# Altium PCB GaN_Driver.PcbDoc
Units mil, origin at the board's own origin, x right, y up, seen from the top; angles counter-clockwise.
Board outline 921.26 x 1011.81 mil, 4 copper layers (Top Layer, GND, Power, Bottom Layer), stack 30.634 mil thick; 29 components, 18 nets, 76 pads, 76 vias.
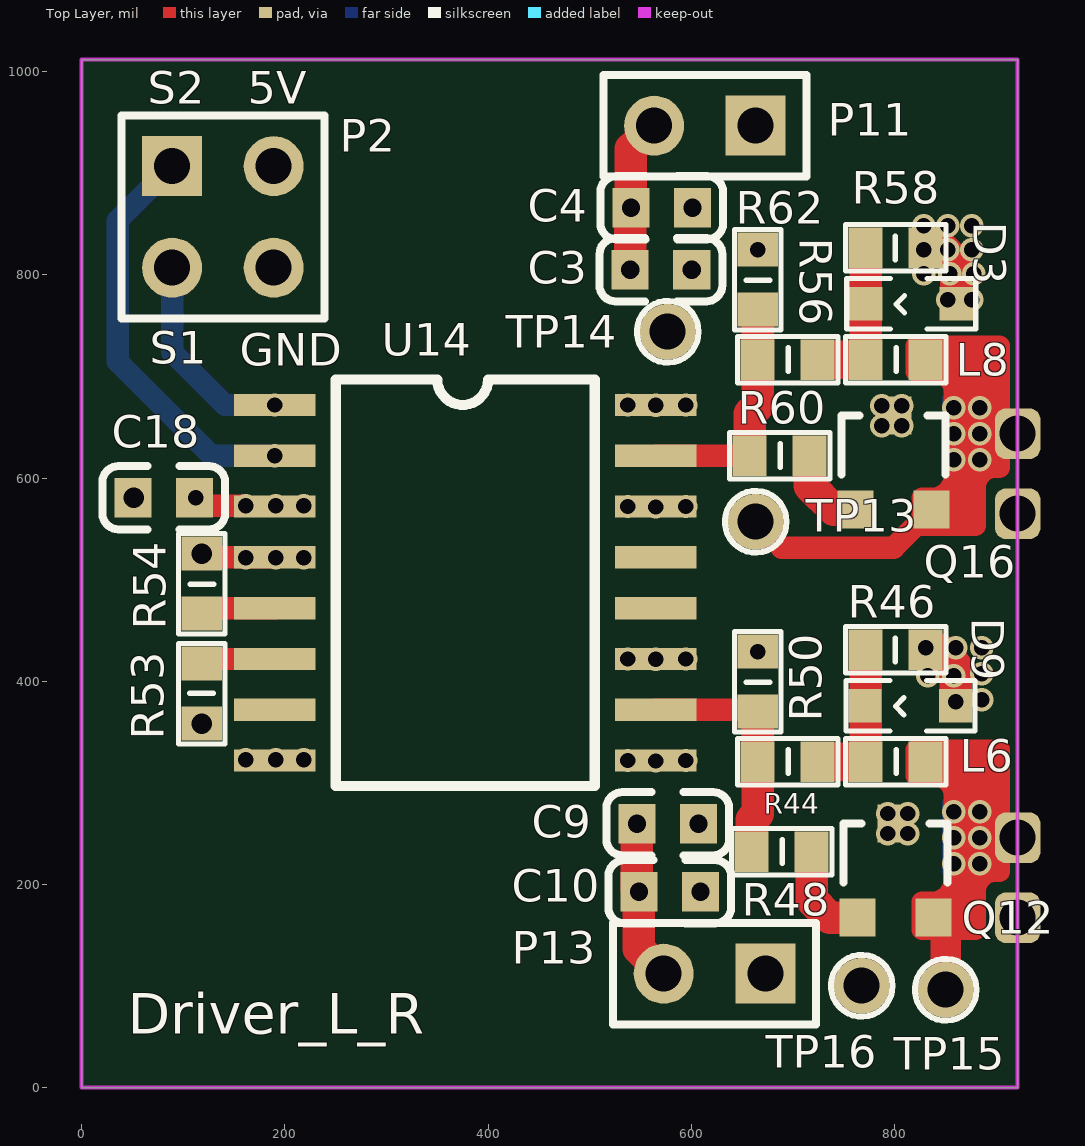
[diagram p0: Top Layer view]
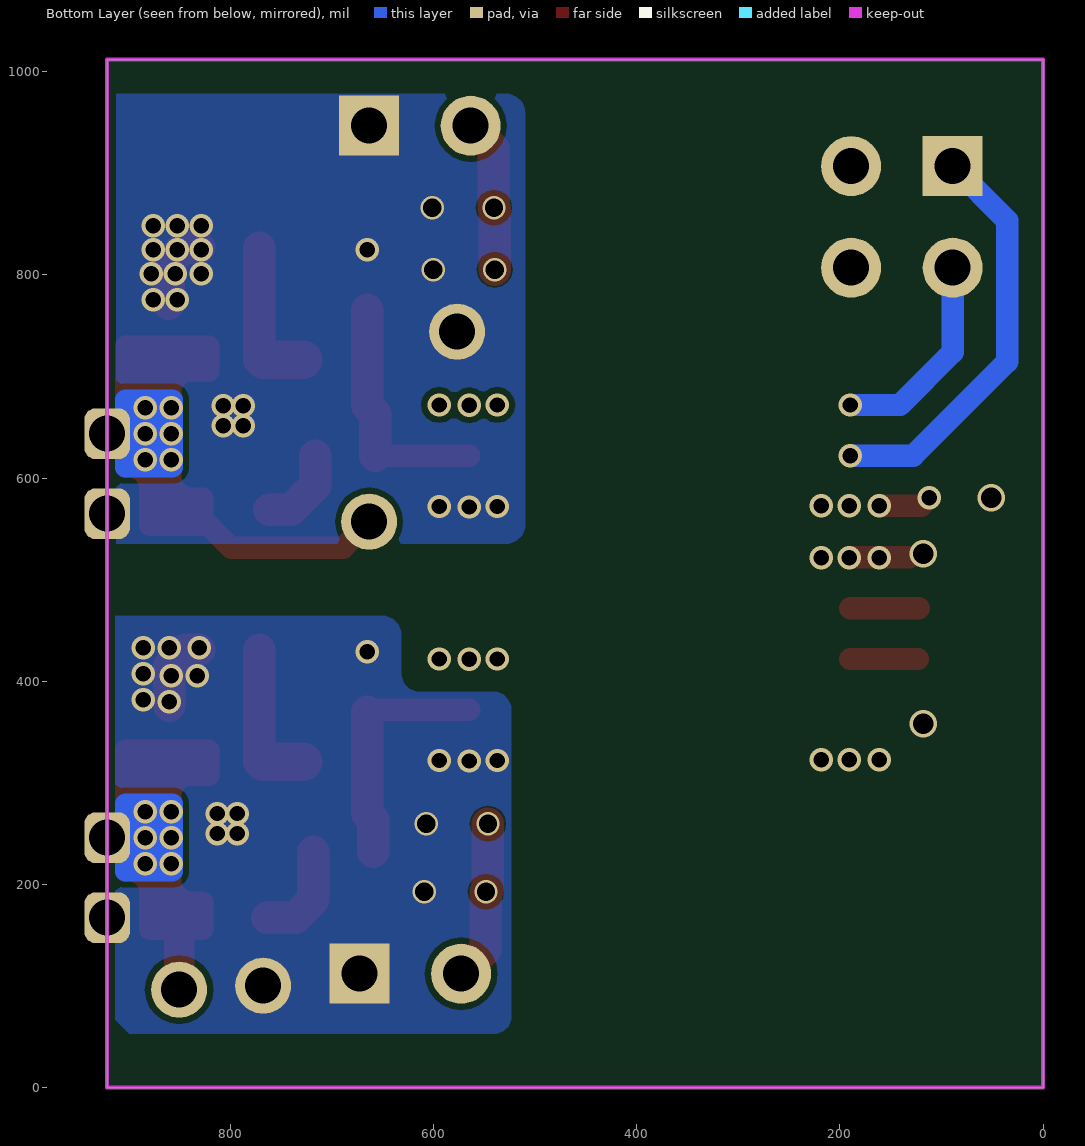
[diagram p1: Bottom Layer view, seen from below]
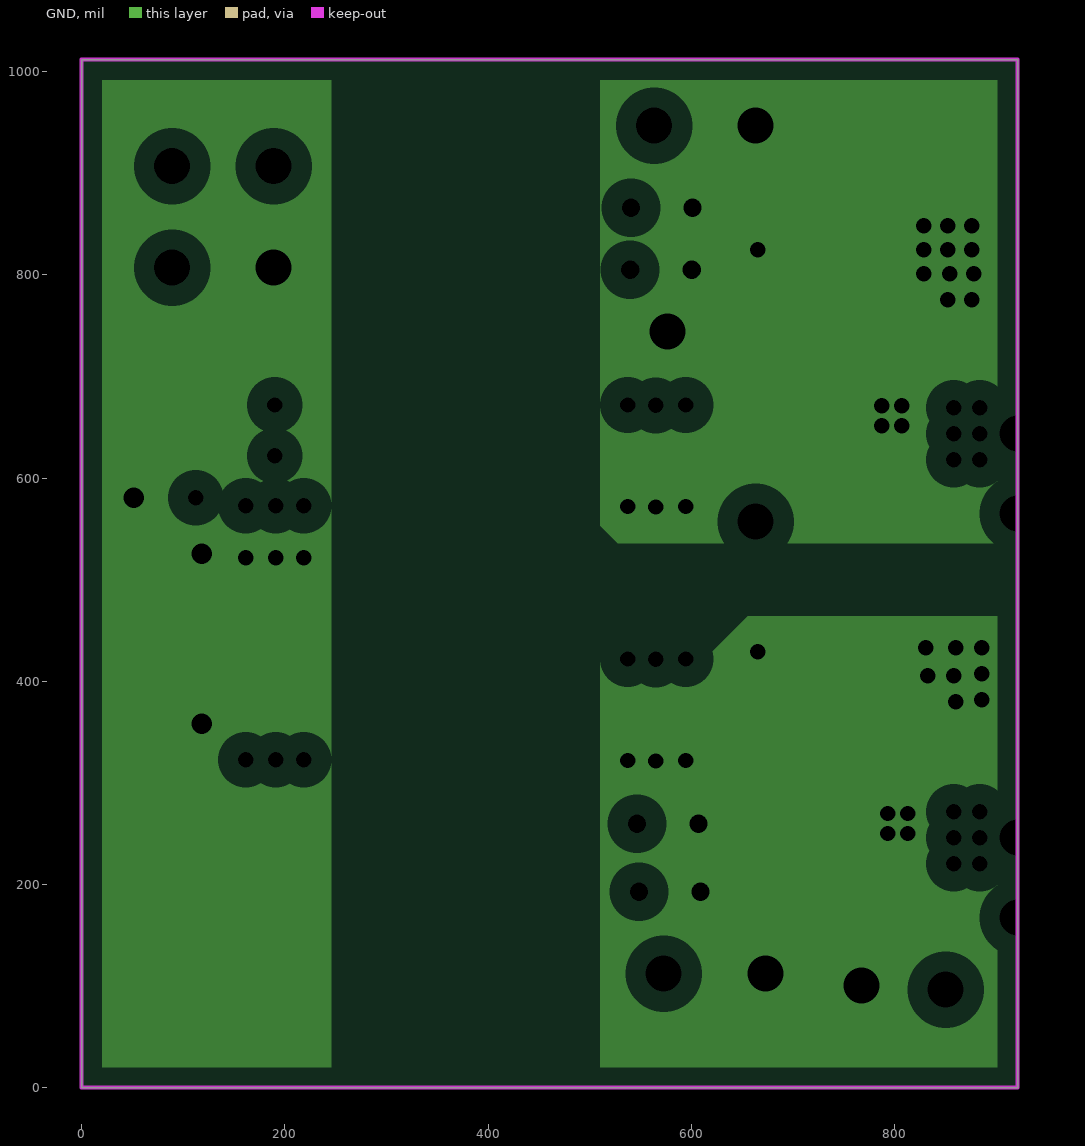
[diagram p2: GND, clearances drawn from the general rule]
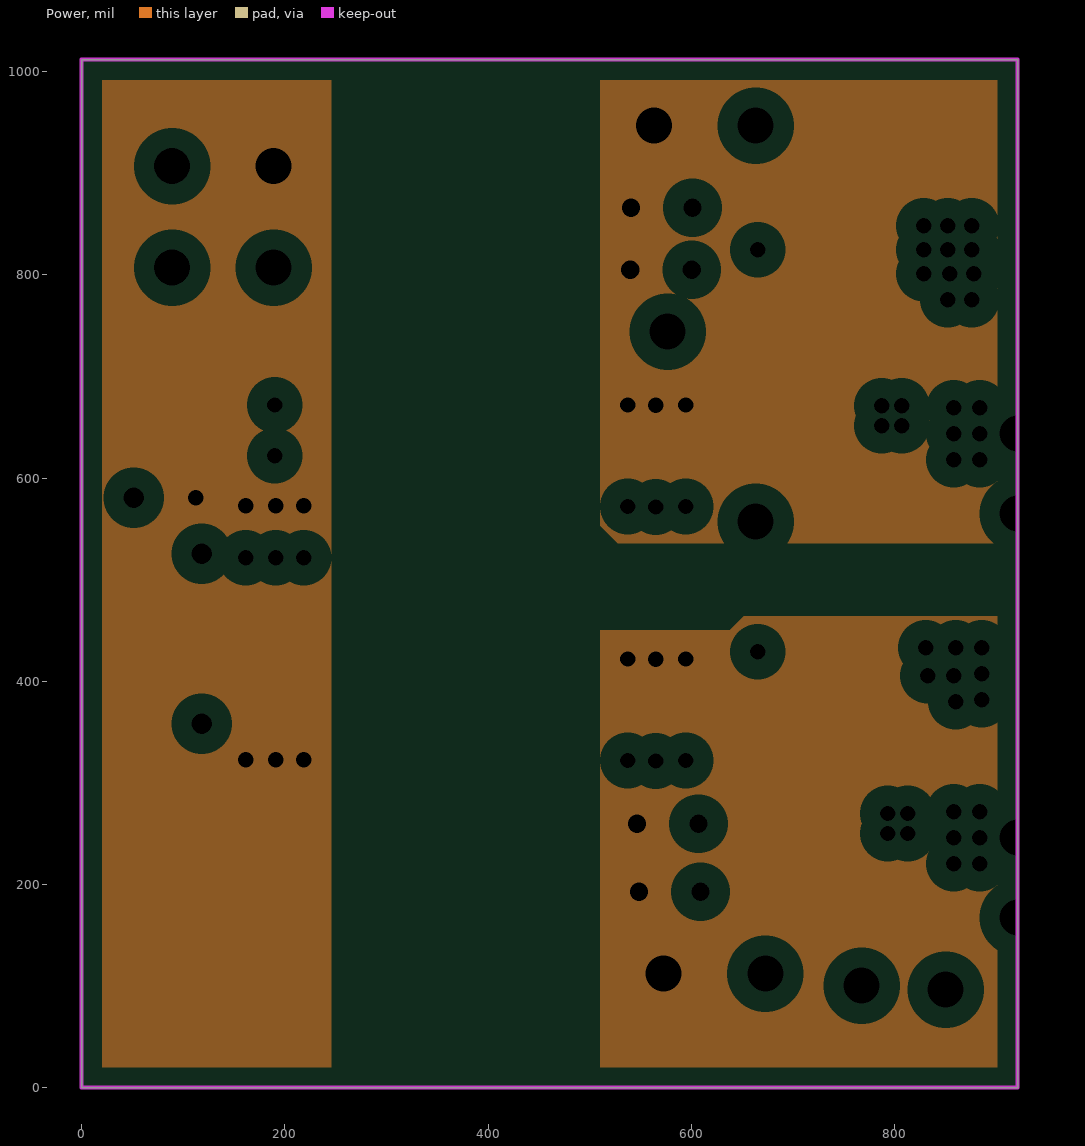
[diagram p3: Power, clearances drawn from the general rule]

## Layer stack, top to bottom
Top Solder: solder mask 0.4, Solder Resist, Dk 3.5
Top Layer: signal copper 1.4
Dielectric 1: core 10, FR-4, Dk 4.2
GND: plane copper 1.417
Dielectric 3: prepreg 5, Dk 4.2
Power: plane copper 1.417
Dielectric 2: core 10, Dk 4.2
Bottom Layer: signal copper 1.4
Bottom Solder: solder mask 0.4, Solder Resist, Dk 3.5

## Board outline
0,0 0,1011.81 921.26,1011.81 921.26,0

## Design rules (kind name [scope] priority, off if disabled: settings)
Clearance [All] p1: gap=5.91
ComponentClearance [All] p1: gap=1 collisioncheckmode=3 verticalgap=10 showdistances=FALSE
PlaneClearance [All] p1: clearance=20
PlaneConnect [All] p1: planeconnectstyle=Direct reliefexpansion=20 reliefentries=4 reliefconductorwidth=10 reliefairgap=10
PolygonConnect [All] p1: connectstyle=Direct reliefconductorwidth=10 reliefentries=4 polygonreliefangle="90 Angle" airgapwidth=10
RoutingVias [All] p1: holewidth=28 width=50 viastyle="Through Hole" minholewidth=10 minwidth=20 maxholewidth=28 maxwidth=50
SilkToSilkClearance [All] p1: silktosilkclearance=0
SilkToSolderMaskClearance [IsPad] p1: minsilkscreentomaskgap=0 clearancetoexposedcopper=TRUE
SolderMaskExpansion [All] p1: expansion=4
Width [All] p1: maxlimit=100 minlimit=10 preferedwidth=20
25 further rules are at their usual default settings.

## Components (designator, comment, footprint, x,y, rotation, side; value= is the part's Value field where it differs from the comment)
C3 "2.2uF" 0603_C 570.08,805.12 r0 top
C4 "0.1uF" 0603_C 570.87,866.14 r0 top
C9 "2.2uF" 0603_C 576.77,259.84 r0 top
C10 "0.1uF" 0603_C 578.74,192.91 r0 top
C18 "1uF" 0603_C 80.71,580.71 r180 top
D3 "6.8V" SOD323 860.83,771.65 r270 top
D9 "6.8V" SOD323 860.24,375.98 r270 top
L6 "Inductor Iron" 0603_R 771.65,320.87 r0 top
L8 "Inductor Iron" 0603_R 771.65,716.54 r0 top
P2 "Header 2X2" HDR2X2 88.98,907.09 r270 top
P11 "Header 2" HDR1X2 663.39,946.85 r180 top
P13 "Header 2" HDR1X2 672.83,112.2 r180 top
Q12 "PNP" "SOT-23 (NPN/PNP)" 801.18,208.66 r0 top
Q16 "PNP" "SOT-23 (NPN/PNP)" 799.21,610.24 r0 top
R44 "24R9" 0603_R 665.35,320.87 r0 top
R46 "10K" 0603_R 830.71,431.1 r180 top
R48 "1k" 0603_R 659.45,232.28 r0 top
R50 "10K" 0603_R 665.35,429.13 r270 top
R53 "10K" 0603_R 118.11,358.27 r90 top
R54 "10K" 0603_R 118.11,525.59 r270 top
R56 "24R9" 0603_R 665.35,716.54 r0 top
R58 "10K" 0603_R 830.71,826.77 r180 top
R60 "1k" 0603_R 657.48,622.05 r0 top
R62 "10K" 0603_R 665.35,824.8 r270 top
TP13 "Test_Point" Test_Point 663.39,557.09 r90 top
TP14 "Test_Point" Test_Point 576.77,744.09 r90 top
TP15 "Test_Point" Test_Point 850.39,96.46 r90 top
TP16 "Test_Point" Test_Point 767.72,100.39 r90 top
U14 "UCC21520" SOIC-16W 189.96,672.05 r0 top

## Footprints (in the part's own frame and the unit in brackets; to place one, negate y for a bottom-side part, rotate by r counter-clockwise, add the part's x,y. Pads: shape width x height; smd on the part's side, far side on the other; paste and mask are expansions set on the pad)
0603_C [mm]
  rect 0.93x0.98 smd: 1(-0.77,0) 2(0.77,0)
  silkscreen extent -1.53,-0.79 1.54,0.79, body extent -0.8,-0.4 0.8,0.4, height 0.3
0603_R [mm]
  rect 0.85x1.016 smd: 1(0,0) 2(1.5,0)
  silkscreen extent -0.51,-0.58 2.01,0.58
HDR1X2 [mm] "Connector; Header; 2 Position"
  rect 1.5x1.5 hole 0.9: 1(0,0)
  round 1.5 hole 0.9: 2(2.54,0)
  silkscreen extent -1.27,-1.27 3.81,1.27
HDR2X2 [mm] "Connector; Header; 2x2 Position"
  rect 1.5x1.5 hole 0.9: 1(0,0)
  round 1.5 hole 0.9: 2(0,2.54) 3(2.54,0) 4(2.54,2.54)
  silkscreen extent -1.27,-1.27 3.81,3.81
SOD323 [mm]
  rect 0.83x0.83 smd mask+0: 1(0,0)
  rect 0.83x0.83 smd paste+0 mask+0: 2(0,-2.265)
  silkscreen extent -0.64,-2.74 0.64,0.49
SOIC-16W [mil]
  rect 80x22 smd: 1(0,0) 2(0,-50) 3(0,-100) 4(0,-150) 5(0,-200) 6(0,-250) 7(0,-300) 8(0,-350) 9(375,-350) 10(375,-300) 11(375,-250) 12(375,-200) 13(375,-150) 14(375,-100) 15(375,-50) 16(375,0)
  silkscreen extent 60,-375 315,25
"SOT-23 (NPN/PNP)" [mm]
  rect 0.9x0.95 smd: 1(0,1.302) 2(-0.95,-1.048) 3(0.95,-1.048)
  silkscreen extent -1.3,-0.17 1.3,1.3
Test_Point [mm]
  round 1.4 hole 0.9: 1(0,0)
  silkscreen extent -0.77,-0.77 0.77,0.77

## Part data
C3 C4 C9 C10 C18: library part Cap, "Capacitor"
D3 D9: library part "D Zener", "Zener Diode"
L6 L8: "Magnetic-Core Inductor"
P2: "Header, 2-Pin, Dual row"
P11 P13: "Header, 2-Pin"
Q12 Q16: "PNP Bipolar Transistor"
R44 R46 R48 R50 R53 R54 R56 R58 R60 R62: library part "Res Semi", "Semiconductor Resistor"

## Free pads (board coordinates)
  rrect50% 45x50 hole 35.43: 3(921.26,564.96) 3(921.26,643.7) 3(921.26,167.32) 3(921.26,246.06)

## Via types
v1: diameter 23, hole 15, Top Layer to Bottom Layer, 65 vias
v2: diameter 23, hole 18, Top Layer to Bottom Layer, 8 vias
v3: diameter 27, hole 20, Top Layer to Bottom Layer, 3 vias

## Nets (pads, with @x,y where several pads share a name; then routed paths per layer and width w, separated by ;. In a path a pad name is that pad's centre, name@x,y a point inside that pad or via, vN(x,y) a via of type N, cw(c..) or ccw(c..) an arc to the next point about the centre after c; other vN are vias at no path point)
+5V: C18.1 P2.2 U14.3 U14.8 | length 50.5
  Top Layer w22: v1(112.2,580.71) 120.08,572.83 U14.3@159.45,572.83
  other v1: 161.42,322.83 190.94,322.83 218.5,322.83 161.42,572.83 190.94,572.83 218.5,572.83
DGND: C18.2 P2.4 R53.1 R54.1 U14.4 | length 58.5
  Top Layer w22: R54.1@131.5,522.05 U14.4
  other v1: 161.42,521.65 190.94,521.65 218.5,521.65
  other v3: 118.11,358.27 118.11,525.59 51.18,580.71
L_BUS-: C9.2 C10.2 D9.1 P13.1 pad.3@921.26,167.32 Q12.1 R46.1 R50.1 TP16.1 U14.9 | length 75.4
  Top Layer w32: R46.1 844.49,431.1 860.24,415.35 D9.1
  other v1: 793.31,250.16 812.99,250.16 793.31,269.84 812.99,269.84 537.4,322.05 564.96,321.65 594.49,322.05 860.24,379.92 885.83,381.89 832.68,405.51 858.27,405.51 885.83,407.48 665.35,429.13 830.71,433.07 860.24,433.07 885.83,433.07
  other v2: 609.06,192.91 607.09,259.84
L_R1G: L8.2 pad.3@921.26,643.7 Q16.3 TP13.1 | length 199.4
  Top Layer w22: TP13.1 688.98,531.5 799.13,531.5 Q16.3
  other v1: 858.27,618.11 883.86,618.11 858.27,643.7 883.86,643.7 858.27,669.29 883.86,669.29
L_R1V6.5: C3.1 C4.1 P11.2 U14.16 | length 151.5
  Top Layer w32: v2(539.76,805.12) 539.76,865.35 v2(540.55,866.14) 540.55,924.02 P11.2
  other v1: 537.4,672.05 564.96,671.65 594.49,672.05
L_R2G: L6.2 pad.3@921.26,246.06 Q12.3 TP15.1 | length 75.8
  Top Layer w30: Q12.3 850.39,155.59 TP15.1
  other v1: 858.27,220.47 883.86,220.47 858.27,246.06 883.86,246.06 858.27,271.65 883.86,271.65
L_R2V6.5: C9.1 C10.1 P13.2 U14.11 | length 158.6
  Top Layer w32: v2(546.46,259.84) 546.46,194.88 v2(548.43,192.91) 548.43,136.61 P13.2
  other v1: 537.4,422.05 564.96,421.65 594.49,422.05
L_R_SW: C3.2 C4.2 D3.1 P11.1 pad.3@921.26,564.96 Q16.1 R58.1 R62.1 TP14.1 U14.14 | length 76.8
  Top Layer w32: R58.1 846.46,826.77 860.83,812.4 D3.1
  other v1: 537.4,572.05 564.96,571.65 594.49,572.05 787.4,651.57 807.09,651.57 787.4,671.26 807.09,671.26 852.36,775.59 875.98,775.59 828.74,801.18 854.33,801.18 877.95,801.18 665.35,824.8 828.74,824.8 852.36,824.8 875.98,824.8 828.74,848.42 852.36,848.42 875.98,848.42
  other v2: 600.39,805.12 601.18,866.14
L_ROUTA: R56.1 R60.1 R62.2 U14.15 | length 239.5
  Top Layer w22: U14.15 R60.1
  Top Layer w32: R60.1 657.48,663.39 665.35,671.26 R56.1 R62.2
L_ROUTB: R44.1 R48.1 R50.2 U14.10 | length 240.6
  Top Layer w22: U14.10 R50.2@665.35,372.05
  Top Layer w32: R48.1 659.45,263.78 665.35,269.68 R44.1 R50.2
NetD3_2: D3.2 L8.1 R56.2 R58.2 | length 149.6
  Top Layer w32: L8.1 D3.2 R58.2
  Top Layer w38: R56.2@728.35,716.54 L8.1@767.72,716.54
NetD9_2: D9.2 L6.1 R44.2 R46.2 | length 149.6
  Top Layer w32: L6.1 R46.2
  Top Layer w38: R44.2@728.35,320.87 L6.1@767.72,320.87
NetQ12_2: Q12.2 R48.2 | length 99.8
  Top Layer w32: R48.2 718.5,185.04 736.14,167.4 Q12.2
NetQ16_2: Q16.2 R60.2 | length 84.6
  Top Layer w32: R60.2 716.54,592.52 740.08,568.98 Q16.2
NetR53_2: R53.2 U14.6 | length 66.7
  Top Layer w22: R53.2@123.23,422.05 U14.6
NetR54_2: R54.2 U14.5 | length 67.5
  Top Layer w22: R54.2@122.44,472.05 U14.5
PWM_L_R1: P2.3 U14.1 | length 205.6
  Bottom Layer w22: P2.3 88.98,724.02 140.95,672.05 v1(189.96,672.05)
PWM_L_R2: P2.1 U14.2 | length 407.5
  Bottom Layer w22: P2.1 35.43,853.54 35.43,714.57 127.95,622.05 v1(189.96,622.05)
pads on no net: U14.7 U14.12 U14.13

## Polygon pours and split planes (outlines as drawn)
L_BUS- on Bottom Layer "Bottom Layer-L_R_SW" (solid, remove dead copper, pour order 32): 913.39,66.93 899.61,53.15 541.34,53.15 cw(c540.92,70.45) 523.62,70.87 523.62,372.05 cw(c541.33,372.05) 541.34,389.76 614.17,389.76 ccw(c613.7,407.96) 631.89,407.48 631.89,444.88 cw(c651.07,445.38) 651.57,464.57 913.39,464.57
L_R_SW on Bottom Layer "Bottom Layer-L_BUS-" (solid, pour order 24): 912.28,978.35 529.53,978.35 ccw(c529.52,958.67) 509.84,958.66 509.84,814.96 509.84,555.12 ccw(c529.53,555.12) 529.53,535.43 912.28,535.43
no net on Top Layer "Top Layer-No Net 2" (solid, pour order 98): 958.66,578.74
L_R1V6.5 on Power (split plane): 901.16,535.43 527.56,535.43 509.84,553.15 509.84,991.71 901.16,991.71
L_R2V6.5 on Power (split plane): 901.16,464.57 901.16,20.1 509.84,20.1 509.84,450.79 637.8,450.79 651.57,464.57
+5V on Power (split plane): 246.06,20.1 20.1,20.1 20.1,991.71 246.06,991.71
L_R_SW on GND (split plane): 901.16,535.43 527.56,535.43 509.84,553.15 509.84,991.71 901.16,991.71
L_BUS- on GND (split plane): 901.16,464.57 901.16,20.1 509.84,20.1 509.84,421.26 612.2,421.26 655.51,464.57
DGND on GND (split plane): 246.06,20.1 20.1,20.1 20.1,991.71 246.06,991.71

## Keep-outs
Keep-Out Layer:
  the board outline again, w3.94

## Other copper
Top Layer:
  region net L_R2G: 816.93,155.51 ccw(c826.77,155.51) 826.77,145.67 879.92,145.67 ccw(c879.92,155.51) 889.76,155.51 889.76,192.91 cw(c899.61,192.91) 899.61,202.76 903.54,202.76 ccw(c903.54,212.6) 913.39,212.6 913.39,332.68 ccw(c903.55,332.69) 903.54,342.52 820.87,342.52 ccw(c820.85,332.69) 811.02,332.68 811.02,307.09 ccw(c820.86,307.08) 820.87,297.24 838.58,297.24 cw(c838.59,287.41) 848.43,287.4 848.43,204.72 cw(c836.61,204.72) 836.61,192.91 826.77,192.91 ccw(c826.76,183.09) 816.93,183.07
  region net L_R1G: 816.93,553.15 ccw(c826.77,553.15) 826.77,543.31 879.92,543.31 ccw(c879.92,553.15) 889.76,553.15 889.76,590.55 cw(c899.61,590.55) 899.61,600.39 903.54,600.39 ccw(c903.54,610.24) 913.39,610.24 913.39,730.31 ccw(c903.55,730.32) 903.54,740.16 820.87,740.16 ccw(c820.85,730.33) 811.02,730.31 811.02,704.72 ccw(c820.86,704.72) 820.87,694.88 838.58,694.88 cw(c838.59,685.05) 848.43,685.04 848.43,602.36 cw(c836.61,602.36) 836.61,590.55 826.77,590.55 ccw(c826.76,580.72) 816.93,580.71
Bottom Layer:
  region: 641.73,842.52
  region net L_R2G: 913.39,212.99 cw(c903.55,212.98) 903.54,203.15 856.69,203.15 cw(c856.69,212.99) 846.85,212.99 846.85,279.53 cw(c856.69,279.53) 856.69,289.37 903.54,289.37 cw(c903.55,279.53) 913.39,279.53
  region net L_R1G: 913.39,610.63 cw(c903.55,610.62) 903.54,600.79 856.69,600.79 cw(c856.69,610.63) 846.85,610.63 846.85,677.17 cw(c856.69,677.17) 856.69,687.01 903.54,687.01 cw(c903.55,677.17) 913.39,677.17
GND (plane layer: these items are gaps in the copper):
  region: 246.06,1011.81 509.84,1011.81 509.84,553.15 527.56,535.43 917.32,535.43 917.32,464.57 655.51,464.57 612.2,421.26 509.84,421.26 509.84,0 246.06,0
Power (plane layer: these items are gaps in the copper):
  region: 246.06,1011.81 509.84,1011.81 509.84,553.15 527.56,535.43 917.32,535.43 917.32,464.57 651.57,464.57 637.8,450.79 509.84,450.79 509.84,0 246.06,0

## Silkscreen, mask and mechanical layers (free items; w line width, h text height)
Top Overlay:
  text "Driver_L_R" at 45.28,53.15 h40
Drill Drawing:
  text ".Legend" at 1019.68,23.62 h60

## Text inside footprints (layer, text, board x,y; h text height)
P2: Top Overlay "S1" at 66.93,712.6 h32; Top Overlay "GND" at 155.51,710.63 h32; Top Overlay "5V" at 163.39,968.5 h32; Top Overlay "S2" at 64.96,968.5 h32